# Altium PCB depg0213.PcbDoc
Units mil, origin at the board's own origin, x right, y up, seen from the top; angles counter-clockwise.
Board outline 1377.95 x 984.25 mil, 2 copper layers (Top Layer, Bottom Layer); 21 components, 23 nets, 76 pads, 50 vias.
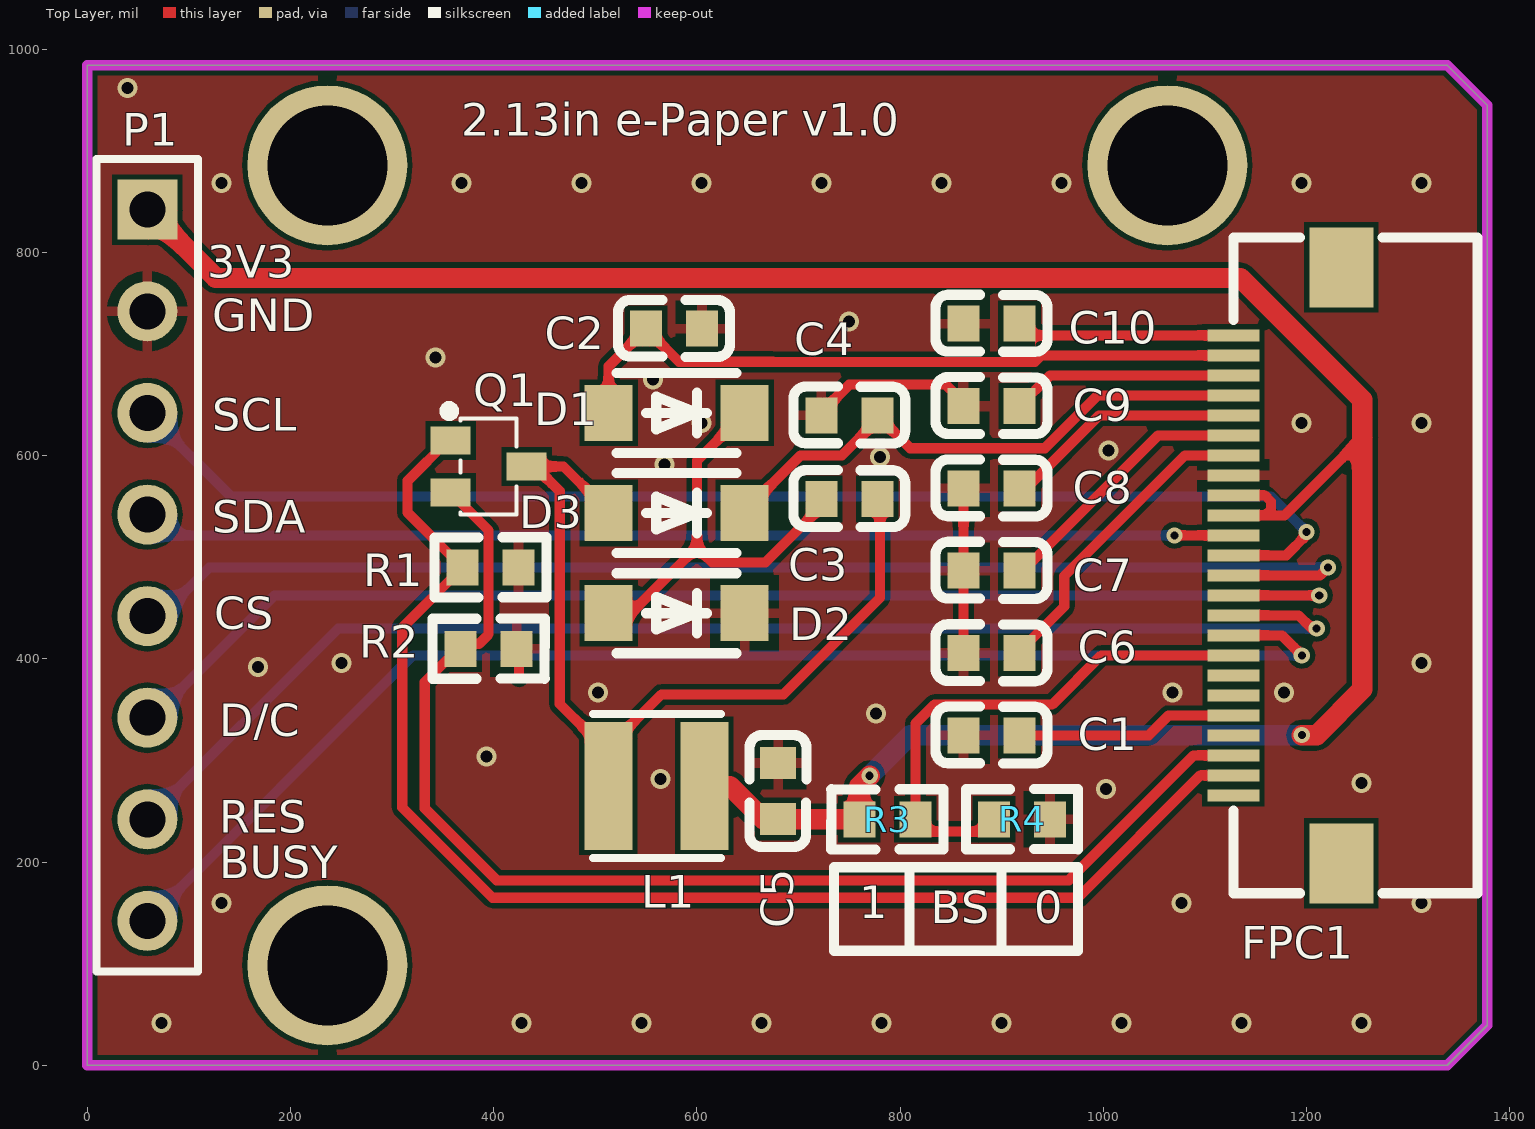
[diagram p0: Top Layer view]
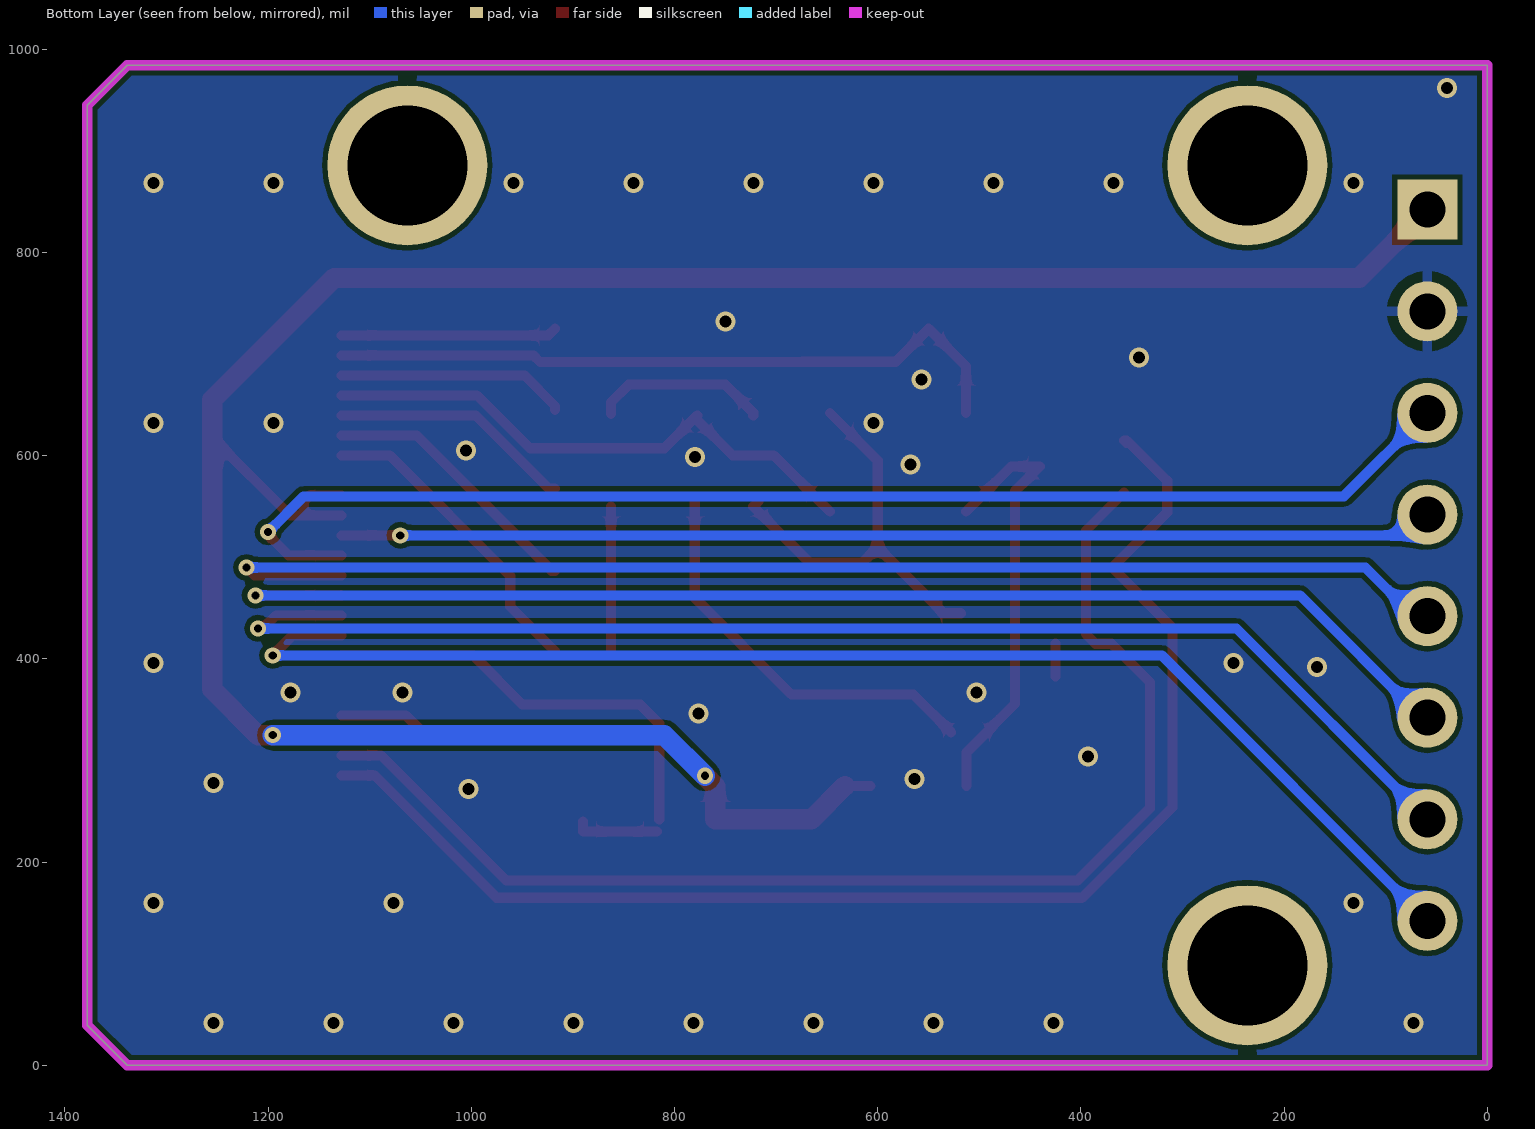
[diagram p1: Bottom Layer view, seen from below]

## Layer stack, top to bottom
Top Solder: solder mask 0.4, Solder Resist, Dk 3.5
Top Layer: signal copper 1.4
Dielectric 1: dielectric 12.6, FR-4, Dk 4.8
Bottom Layer: signal copper 1.4
Bottom Solder: solder mask 0.4, Solder Resist, Dk 3.5

## Board outline
0,0 0,984.25 1338.58,984.25 1377.95,944.88 1377.95,39.37 1338.58,0

## Design rules (kind name [scope] priority, off if disabled: settings)
Clearance [All] p1: gap=5 ignorepadtopadclearanceinfootprint=FALSE except(0: Arc-Hole Track-Hole SMDPad-Hole THPad-Hole Via-Hole Fill-Hole Poly-Hole Region-Hole Text-Hole)
ComponentClearance [All] p1: gap=1 collisioncheckmode=3 verticalgap=10 showdistances=FALSE
PolygonConnect [All vs InNet('GND')] p1: thpad.connectstyle=Relief thpad.reliefconductorwidth=10 thpad.reliefentries=4 thpad.polygonreliefangle="90 Angle" thpad.airgapwidth=10 smdpad.connectstyle=Relief smdpad.reliefconductorwidth=10 smdpad.reliefentries=4 smdpad.polygonreliefangle="90 Angle" smdpad.airgapwidth=10 via.connectstyle=Direct via.reliefconductorwidth=10 via.reliefentries=4 via.polygonreliefangle="90 Angle" via.airgapwidth=10
RoutingVias [All] p1: holewidth=8 width=16 viastyle="Through Hole" minholewidth=6 minwidth=12 maxholewidth=28 maxwidth=50
SolderMaskExpansion [All] p1: expansion=4
Width [All] p1: maxlimit=50 minlimit=6 preferedwidth=10 minimp=50.000000 maximp=50.000000 favimp=50.000000
29 further rules are at their usual default settings.

## Components (designator, comment, footprint, x,y, rotation, side; value= is the part's Value field where it differs from the comment)
C1 "1uF" C0603 890,324.73 r0 top
C2 "1uF" C0603 577.44,725 r0 top
C3 "1uF" C0603 750,557.44 r0 top
C4 "1uF" C0603 750,639.69 r0 top
C5 "1uF" C0603 680,270 r90 top
C6 "1uF" C0603 890,405.78 r0 top
C7 "1uF" C0603 890,486.84 r0 top
C8 "1uF" C0603 890,567.89 r0 top
C9 "1uF" C0603 890,648.95 r0 top
C10 "0.47uF" C0603 890,730 r0 top
D1 "MBR0530" SOD-123_L2.8-W1.8-LS3.7-RD 580,642.13 r180 top
D2 "MBR0530" SOD-123_L2.8-W1.8-LS3.7-RD 580,445 r180 top
D3 "MBR0530" SOD-123_L2.8-W1.8-LS3.7-RD 580,543.56 r180 top
FPC1 "AFC01-S24FCA-00" FPC-SMD_P0.50-24P_FGS-XJ-H2.0 1181.1,492.13 r270 top locked
L1 "47uH" IND-SMD_L3.0-W3.0_SMNR3015 560,275 r180 top value=10mH
P1 "Header 8" HDR1X8 59.06,842.13 r270 top locked
Q1 "SI1304BDL" SC-70-3_L2.1-W1.3-P1.30-LS2.1-BR 395,589.42 r180 top
R1 "10K" R0603 396.81,490 r0 top
R2 "2R2" R0603 395,410 r0 top
R3 "10K" R0603 787.44,242.13 r180 top
R4 "10K" R0603 920,242.13 r0 top

## Footprints (in the part's own frame and the unit in brackets; to place one, negate y for a bottom-side part, rotate by r counter-clockwise, add the part's x,y. Pads: shape width x height; smd on the part's side, far side on the other; paste and mask are expansions set on the pad)
C0603 [mm]
  rect 0.8x0.9 smd: 1(-0.7,0) 2(0.7,0)
  silkscreen extent -1.4,-0.7 1.4,0.72
FPC-SMD_P0.50-24P_FGS-XJ-H2.0 [mm]
  rect 0.3x1.3 smd: 1(-5.748,-1.351) 2(-5.248,-1.351) 3(-4.748,-1.351) 4(-4.248,-1.351) 5(-3.748,-1.351) 6(-3.248,-1.351) 7(-2.748,-1.351) 8(-2.248,-1.351) 9(-1.748,-1.351) 10(-1.248,-1.351) 11(-0.748,-1.351) 12(-0.248,-1.351) 13(0.252,-1.351) 14(0.752,-1.351) 15(1.252,-1.351) 16(1.752,-1.351) 17(2.252,-1.351) 18(2.752,-1.351) 19(3.252,-1.351) 20(3.752,-1.351) 21(4.252,-1.351) 22(4.752,-1.351) 23(5.252,-1.351) 24(5.752,-1.351)
  rect 2x1.6 smd: 25(7.45,1.351) 26(-7.45,1.351)
  silkscreen extent -8.2,-1.35 8.2,4.75
HDR1X8 [mm] "Connector; Header; 8 Position"
  rect 1.5x1.5 hole 0.9: 1(0,0)
  round 1.5 hole 0.9: 2(2.54,0) 3(5.08,0) 4(7.62,0) 5(10.16,0) 6(12.7,0) 7(15.24,0) 8(17.78,0)
  silkscreen extent -1.27,-1.27 19.05,1.27
IND-SMD_L3.0-W3.0_SMNR3015 [mm]
  rect 1.2x3.2 smd: 1(-1.2,0) 2(1.2,0)
  silkscreen extent -1.62,-1.8 1.58,1.8
R0603 [mm]
  rect 0.8x0.9 smd: 1(-0.7,0) 2(0.7,0)
  silkscreen extent -1.4,-0.75 1.4,0.76
SC-70-3_L2.1-W1.3-P1.30-LS2.1-BR [mm]
  rect 1x0.7 smd: 1(0.95,-0.65) 2(0.95,0.65) 3(-0.95,0)
  silkscreen extent -0.7,-1.63 1.23,1.2
SOD-123_L2.8-W1.8-LS3.7-RD [mm]
  rect 1.2x1.4 smd: 1(-1.7,0) 2(1.7,0)
  silkscreen extent -1.5,-1 1.5,1

## Part data
C1 C2 C3 C4 C5 C6 C7 C8 C9 C10: library part CAP_0603, BOM_Manufacturer=YAGEO, BOM_Manufacturer Part=CC0603GRNPO9BN200, BOM_Supplier=LCSC, BOM_Supplier Part=C325469, Contributor=LCSC, nameAlias=Capacitance, spicePre=C, spiceSymbolName=CC0603GRNPO9BN200
D1 D2 D3: "C77336", BOM_LCSC Assembly=Yes, BOM_Manufacturer=CJ, BOM_Manufacturer Part=MBR0530, BOM_Supplier=LCSC, BOM_Supplier Part=C77336, image=//image.lceda.cn/szlcsc/C77336.jpg, SMT Type=Extend, spicePre=D, spiceSymbolName=MBR0530
FPC1: "C262669", BOM_Manufacturer=JUSHUO, BOM_Manufacturer Part=AFC01-S24FCA-00, BOM_Supplier=LCSC, BOM_Supplier Part=C262669, Contributor=LCSC, spicePre=F, spiceSymbolName=AFC01-S24FCA-00
L1: library part Inductor, Code_IEC=1005, Code_JEITA=0402, LatestRevisionDate=29-May-2009, LatestRevisionNote="IPC-7351 Footprint Added.", PackageDescription="Chip Inductor", PackageReference=0402-A, Published=8-Jun-2000, Publisher="Altium Limited"
P1: "Header, 8-Pin", LatestRevisionDate=17-Jul-2002, LatestRevisionNote="Re-released for DXP Platform.", Publisher="Altium Limited"
Q1: "C710060", BOM_JLCPCB SMD=Yes, BOM_Manufacturer="VBsemi Elec", BOM_Manufacturer Part=SI1304BDL, BOM_Supplier=LCSC, BOM_Supplier Part=C710060, Contributor=LCSC, SMT Type=Extend, spicePre=Q, spiceSymbolName=SI1304BDL
R1 R2 R3 R4: library part RES_0603, BOM_Manufacturer=LIZ, BOM_Manufacturer Part=CR0603JA0301G, BOM_Supplier=LCSC, BOM_Supplier Part=C101323, nameAlias="Resistance (Ohms)", spicePre=R, spiceSymbolName=CR0603JA0301G

## Free pads (board coordinates)
  round 157.48 hole 118.11: 1(236.22,98.43) 1(236.22,885.83) 1(1062.99,885.83)

## Via types
v1: diameter 19.68, hole 11.81, Top Layer to Bottom Layer, 42 vias
v2: diameter 16, hole 8, Top Layer to Bottom Layer, 8 vias

## Nets (pads, with @x,y where several pads share a name; then routed paths per layer and width w, separated by ;. In a path a pad name is that pad's centre, name@x,y a point inside that pad or via, vN(x,y) a via of type N, cw(c..) or ccw(c..) an arc to the next point about the centre after c; other vN are vias at no path point)
BS: FPC1.17 R3.1 R4.1 | length 517.1
  Top Layer w10: R3.1 815,336.3 833.7,355 949.6,355 998.07,403.47 FPC1.17 ; R3.1@817.56,230 890,230 R4.1@890,239.73
BUSY: FPC1.16 P1.8 | length 1320.3
  Top Layer w10: FPC1.16 1175.74,423.15 v2(1195.42,403.47)
  Bottom Layer w10: P1.8 320.4,403.47 v2(1195.42,403.47)
CS: FPC1.13 P1.5 | length 1278.5
  Top Layer w10: FPC1.13 1213.42,482.21 v2(1221.21,490)
  Bottom Layer w10: P1.5 72.13,442.13 120,490 v2(1221.21,490)
D/C: FPC1.14 P1.6 | length 1288.6
  Top Layer w10: FPC1.14@1128.41,463 FPC1.14 v2(1212.52,462.52)
  Bottom Layer w10: P1.6 64.02,342.13 184.41,462.52 v2(1212.52,462.52)
GDR: FPC1.23 Q1.1 R1.1 | length 1335.6
  Top Layer w10: Q1.1@355.15,612.56 Q1.1 355,615 315.32,575.32 315,575.32 315,544.26 R1.1 310,430.74 310,253.79 398.79,165 975,165 1095.36,285.36 FPC1.23
GND: C1.1 C2.2 C4.1 C5.2 C6.1 C7.1 C8.1 C9.1 C10.1 D2.1 FPC1.8 P1.2 R1.2 R2.2 R4.2 | length 349.4
  Top Layer w10: 425,382.56 R2.2@425,415 ; C4.1 722.44,642.44 750,670 845,670 862.44,652.56 C9.1 C9.1@862.44,641.25 ; C6.1 C7.1 862.44,550
  other v1: 72.87,41.42 427.2,41.42 545.31,41.42 663.42,41.42 781.53,41.42 899.64,41.42 1017.76,41.42 1135.87,41.42 1253.98,41.42 131.93,159.53 1076.81,159.53 1313.03,159.53 1002.87,271.89 1253.98,277.64 563.95,281.89 392.87,303.9 776.17,346.3 502.87,366.89 1067.87,366.89 1177.87,366.89 167.87,391.89 250.04,395.75 1313.03,395.75 567.87,591.31 780,598.84 1005,605 604.37,631.97 1194.92,631.97 1313.03,631.97 556.93,675 342.87,696.89 749.65,731.89 131.93,868.19 368.15,868.19 486.26,868.19 604.37,868.19 722.48,868.19 840.59,868.19 958.7,868.19 1194.92,868.19 1313.03,868.19 39.51,961.89
NetC3_1: C3.1 D1.1 D2.2 | length 418.9
  Top Layer w10: D2.2@518.07,445 535,445 600,510 ; D1.1 600,595.2 600,510 ; C3.1@717.44,555 722.44,550 667.44,495 615,495 600,510
NetC3_2: C3.2 D3.2 L1.2 Q1.3 | length 837.3
  Top Layer w10: L1.2 512.76,307.8 465,355.55 465,565 440.58,589.42 468.66,589.42 D3.2@513.07,545 ; L1.2@527.76,327.76 565,365 685,365 780.11,460.11 C3.2@780.11,555
RES: FPC1.15 P1.7 | length 1316.2
  Top Layer w10: FPC1.15 1192.16,442.84 1205,430 v2(1210,430)
  Bottom Layer w10: P1.7 246.93,430 v2(1210,430)
RESE: FPC1.22 Q1.2 R2.1 | length 1237.8
  Top Layer w10: Q1.2 395.01,526.41 395.01,424.36 385.64,415 369.88,415 332.12,377.24 332.12,252.88 402.99,182.01 965.95,182.01 1088.97,305.04 FPC1.22
SCL: FPC1.12 P1.3 | length 1272.9
  Top Layer w10: FPC1.12 1180,501.89 1200,521.89 v2(1200,525)
  Bottom Layer w10: P1.3 141.18,560 1165,560 v2(1200,525)
SDA: FPC1.11 P1.4 | length 1077.4
  Top Layer w10: v2(1070,521.58) FPC1.11
  Bottom Layer w10: P1.4 79.61,521.58 v2(1070,521.58)
TSCL: FPC1.19
TSDA: FPC1.18
VCI: C5.1 FPC1.9 FPC1.10 L1.1 P1.1 R3.2 | length 2506.5
  Top Layer w10: L1.1 632.24,275 ; FPC1.10 1159.13,541.26 ; FPC1.9 1159.05,560.95 1165,555 1165,547.13 1159.13,541.26 ; 1255,617.84 1178.42,541.26 1159.13,541.26
  Top Layer w20: P1.1 126.18,775 1135,775 1255,655 1255,617.84 1255,370 1210,325 v2(1195.42,325) ; 632.24,275 665.12,242.13 R3.2 759.88,274.88 v2(770,285)
  Bottom Layer w20: v2(770,285) 810,325 v2(1195.42,325)
VCOM: C10.2 FPC1.1 | length 213.1
  Top Layer w10: C10.2@917.56,725 924.13,718.43 FPC1.1
VDD: C6.2 FPC1.7 | length 309.6
  Top Layer w10: C6.2 917.56,407.56 961.61,451.61 961.61,481.61 1080.32,600.32 FPC1.7
VGH: C4.2 D3.1 FPC1.4 | length 553.3
  Top Layer w10: D3.1@646.93,545 702.24,600.32 742.87,600.32 C4.2@777.56,635 ; C4.2 809.96,607.28 942.28,607.28 994.37,659.37 FPC1.4
VGL: C2.1 D1.2 FPC1.2 | length 692.4
  Top Layer w10: D1.2 513.07,688.19 C2.1 582.33,692.56 674.69,692.56 674.97,692.28 932.45,692.28 938.9,698.74 FPC1.2
VPP: C7.2 FPC1.6 | length 265.5
  Top Layer w10: C7.2 920.87,486.84 1054.04,620 FPC1.6
VSH1: C8.2 FPC1.5 | length 240.1
  Top Layer w10: C8.2 924.1,567.89 995.9,639.69 FPC1.5
VSH2: C1.2 FPC1.20 | length 218.5
  Top Layer w10: C1.2 1044.73,324.73 1064.41,344.41 FPC1.20
VSL: C9.2 FPC1.3 | length 225.4
  Top Layer w10: C9.2@917.56,645 C9.2@917.56,647.56 ; C9.2 947.67,679.06 FPC1.3
pads on no net: FPC1.21 FPC1.24 FPC1.25 FPC1.26

## Polygon pours and split planes (outlines as drawn)
GND on Bottom Layer "Bottom LayerGND" (solid, remove dead copper, pour order 4): 0,984.25 0,0 1338.58,0 1377.95,39.37 1377.95,944.88 1338.58,984.25
GND on Top Layer "Top Layer-GND" (solid, remove dead copper, pour order 3): 0,984.25 0,0 1338.58,0 1377.95,39.37 1377.95,944.88 1338.58,984.25

## Keep-outs
Keep-Out Layer:
  the board outline again, w10

## Silkscreen, mask and mechanical layers (free items; w line width, h text height)
Top Overlay:
  lines w10: 809.25,112.71 809.25,195 ; 899.64,112.71 899.64,195 ; 735,112.71 975.16,112.71 975,112.87 975,195 735,195 735,112.71
  text "2.13in e-Paper v1.0" at 368.15,915 h32
  text "3V3" at 117.99,775.32 h32
  text "GND" at 122.99,722.44 h32
  text "SCL" at 122.99,624.41 h32
  text "SDA" at 122.99,524.41 h32
  text "CS" at 125,429 h32
  text "D/C" at 130,324 h32
  text "RES" at 130,229 h32
  text "BUSY" at 130,184 h32
  text "1" at 760,145 h32
  text "BS" at 830,140 h32
  text "0" at 931.84,140 h32
Mechanical 1:
  the board outline again, w10